# Altium PCB backup.PcbDoc (part 2 of 3)
Units mm, origin at the board's own origin, x right, y up, seen from the top; angles counter-clockwise.
Board outline 28.94 x 32.03 mm, 4 copper layers (Top Layer, Inner Layer 1, Inner Layer 2, Bottom Layer), stack 1.586 mm thick; 135 components, 83 nets, 442 pads, 355 vias.
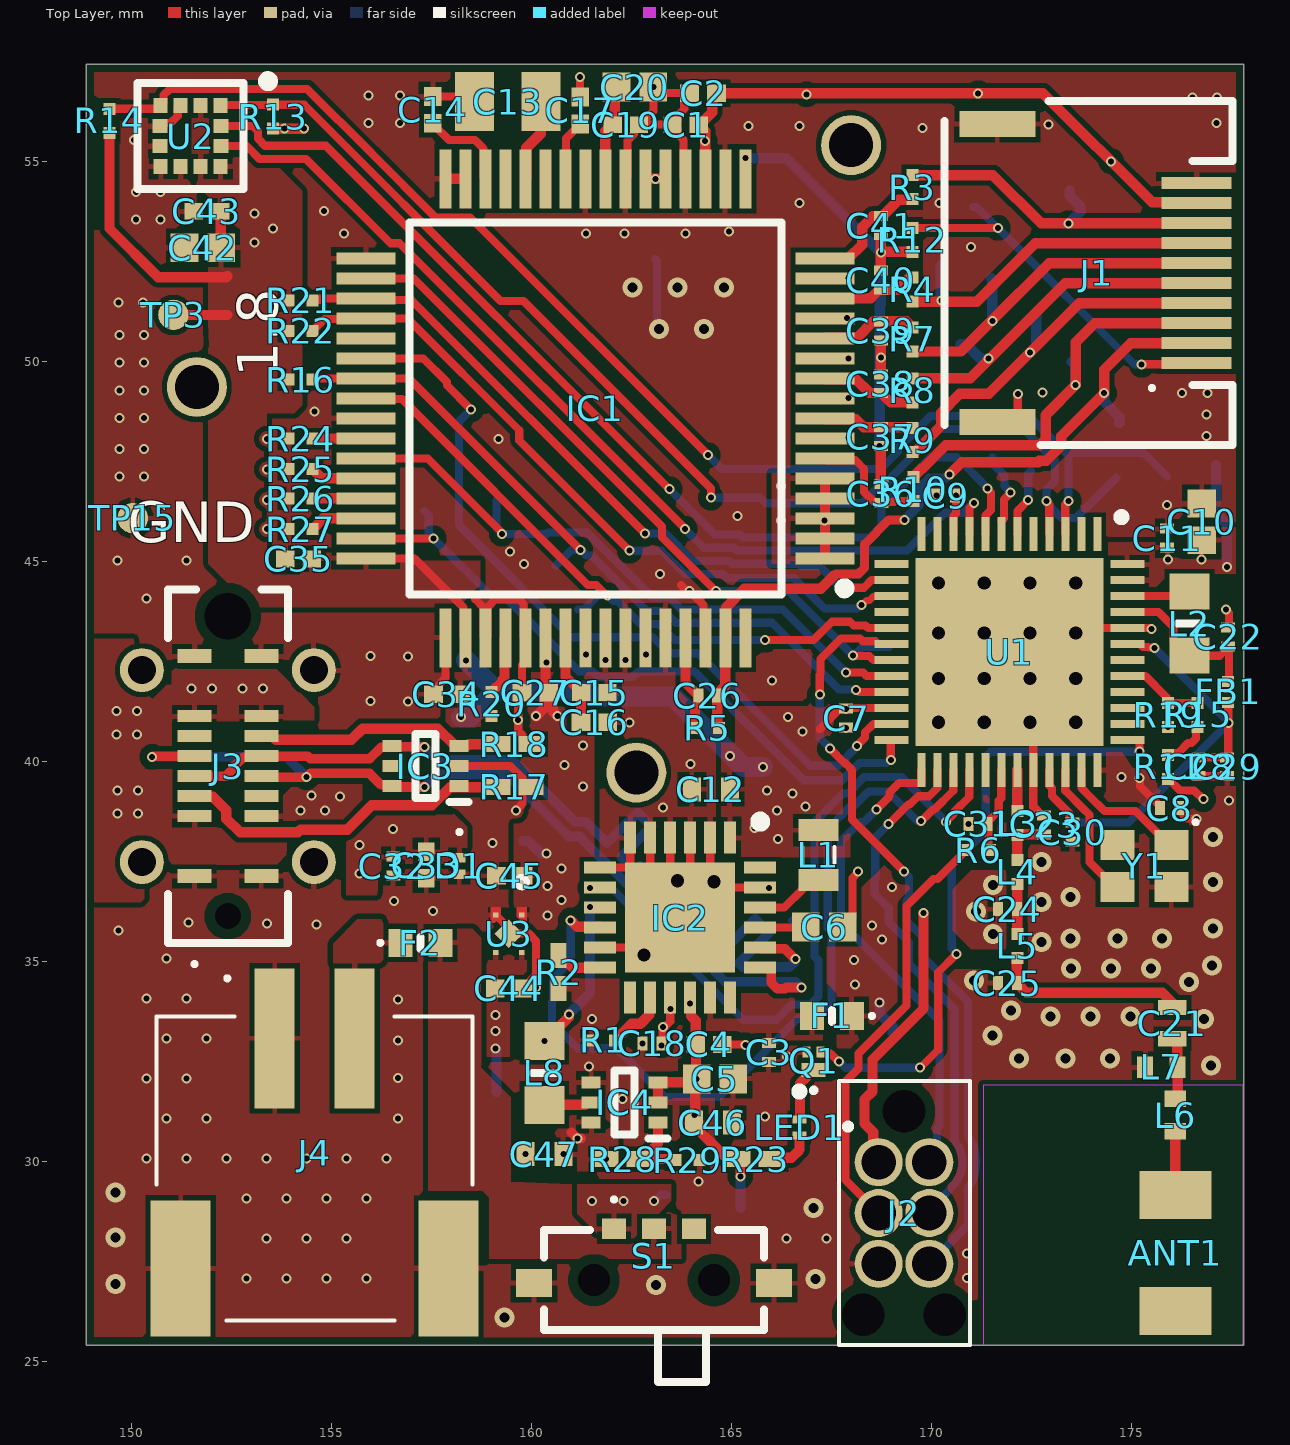
[diagram p0: Top Layer view]

## Via types
v1: diameter 0.25, hole 0.15, Top Layer to Bottom Layer, 295 vias
v2: diameter 0.5, hole 0.25, Top Layer to Bottom Layer, 41 vias
v3: diameter 0.66, hole 0.33, Top Layer to Bottom Layer, 19 vias

## Nets (pads, with @x,y where several pads share a name; then routed paths per layer and width w, separated by ;. In a path a pad name is that pad's centre, name@x,y a point inside that pad or via, vN(x,y) a via of type N, cw(c..) or ccw(c..) an arc to the next point about the centre after c; other vN are vias at no path point)
+1.8V: C7.1 C8.1 C9.1 C10.2 C11.1 C12.2 C34.1 C35.1 C42.1 C43.1 IC1.48 IC1.50 IC2.1 J2.1 L1.1 R13.2 R14.2 R16.2 R20.2 R21.2 R22.2 TP3.1 TP14.1 U1.10 U1.22 U1.36 U1.47 U1.48 U2.2 U2.9 U2.10 | length 37.4
  Top Layer w0.203: IC1.48@155.865,45.068 157.075,45.068 158.304,43.839 158.304,43.129 IC1.50@158.353,43.08 ; 167.202,40.792 167.695,41.285 C7.1@167.854,41.285 ; v1(167.869,41.3) C7.1@167.854,41.285 ; U1.22@169,41.325 167.893,41.325 C7.1@167.854,41.285 ; U1.10@170.55,45.675 170.552,45.677 170.552,46.125 170.62,46.193 170.62,46.634 v1(170.612,46.634) ; v1(175.209,39.573) 175.218,39.564 175.218,39.37 175.713,38.875 C8.1@175.713,38.825
  Top Layer w0.254: R14.2@149.454,55.707 149.454,53.315 150.673,52.095 152.375,52.095 152.4,52.121 ; TP3.1@151.054,51.156 152.4,51.156 ; C43.1@152.222,53.746 152.236,53.732 152.236,52.846 C42.1@152.25,52.832 ; R13.2@153.543,55.809 v1(154.319,55.809) ; J2.1@168.681,29.972 168.55,30.103 168.55,30.72 168.326,30.945 168.326,31.539 168.533,31.746 168.533,32.541 169.804,33.813 v1(169.804,36.205)
  Inner Layer 2 w0.254: v1(169.804,36.205) 169.804,37.623
  Bottom Layer w0.254: TP14.1@177.114,47.396 177.114,46.197 177.394,45.918 v1(177.394,44.856)
  Bottom Layer w0.508: v1(158.242,41.097) 158.465,41.097 159.128,41.76 ; v1(158.369,42.52) 159.128,41.76 ; v1(165.79,39.853) 165.303,39.853 163.54,41.616 161.472,41.616 161.327,41.76 159.128,41.76
  other v1: 166.167,38.049 165.583,38.329 166.141,38.76 166.856,38.866 166.526,39.196 165.887,39.268 174.752,39.599 164.973,40.132 166.776,40.742 166.421,41.097 175.92,45.034 176.759,45.034 153.086,52.959 153.543,53.315 153.086,53.696 153.825,55.809
+5V: C1.1 C2.1 C27.1 C45.1 IC1.1 IC1.2 IC1.3 IC1.4 IC1.5 IC1.7 IC1.9 IC1.11 IC1.13 IC1.15 IC1.19 IC1.21 IC1.22 IC1.54 IC1.56 IC1.59 J1.9 TP11.1 U3.1 | length 21.7
  Top Layer w0.254: v1(160.122,41.123) 160.329,41.33 160.329,41.619 160.422,41.712 C27.1@160.437,41.712 ; IC1.54@160.353,43.08 IC1.54@160.353,42.492 ; v1(160.378,42.467) IC1.54@160.353,42.492 ; v1(160.655,41.123) 160.545,41.233 160.545,41.619 160.452,41.712 C27.1@160.437,41.712 ; IC1.1@167.335,45.166 167.335,45.074 IC1.1@167.341,45.068 ; v1(167.335,46.02) 167.335,46.063 IC1.3@167.341,46.068 ; IC1.1@167.341,45.166 IC1.2@167.341,45.568 IC1.3@167.341,46.068 ; IC1.5@167.341,47.068 IC1.4@167.341,46.568 IC1.3@167.341,46.068 ; IC1.54@160.353,42.492 160.353,41.796 C27.1@160.437,41.712
  Top Layer w0.262: IC1.22@162.853,54.556 v1(163.103,54.556) IC1.21@163.353,54.556 ; C1.1@164.191,55.91 C1.1@164.211,55.91 ; IC1.19@164.353,54.556 164.353,55.748 164.29,55.811 164.29,55.831 C1.1@164.211,55.91 ; J1.9@176.63,53.95 176.611,53.969 175.52,53.969 172.791,56.698 171.171,56.698 166.878,56.698 C2.1@164.628,56.698 164.613,56.698 164.524,56.609 164.524,56.223 C1.1@164.211,55.91
  Bottom Layer w0.254: TP11.1@159.791,37.998 159.929,37.998 160.234,37.694 v1(160.376,37.694)
  other v1: 160.401,36.144 160.757,36.525 160.401,36.881 160.757,37.313 161.29,39.37 160.833,39.903 161.29,40.386 161.366,42.67 162.865,42.67 166.243,46.02 166.243,46.873 167.925,48.087 167.925,49.078 167.925,50.068 167.889,51.077 167.925,52.075 174.498,54.991 164.338,55.499 166.878,56.667 171.171,56.693
CC1: IC3.1 J3.A5 R17.1 | length 8.6
  Top Layer w0.262: J3.A5@151.58,39.125 151.599,39.106 152.039,39.106 152.379,38.766 152.379,38.557 152.718,38.217 154.164,38.217 154.23,38.283 155.402,38.283 156.013,38.894 157.514,38.894 157.97,39.35 R17.1@159.163,39.35
CC2: IC3.3 J3.B5 R18.1 | length 6.3
  Top Layer w0.262: J3.B5@153.25,40.625 153.269,40.606 153.544,40.606 153.617,40.533 155.501,40.533 155.78,40.812 157.664,40.812 158.081,40.394 158.409,40.394 158.44,40.425 R18.1@159.163,40.425
D_N: IC2.19 IC3.6 J3.A7 J3.B7 | length 22.6
  Top Layer w0.24: v1(150.52,40.107) 150.523,40.107 150.541,40.125 J3.A7@151.58,40.125 ; J3.B7@153.25,39.625 153.275,39.6 154.379,39.6 v1(154.381,39.599) 154.384,39.599 154.476,39.691 155.959,39.691 156.245,39.405 156.482,39.405 IC3.6@156.512,39.375 156.535,39.352 157.323,39.352 v1(157.325,39.35) ; IC2.19@165.723,34.837 165.97,34.837 165.999,34.807 165.999,34.456 166.145,34.31 166.344,34.31 166.373,34.339 166.749,34.339 v1(166.751,34.341)
  Bottom Layer w0.24: v1(150.52,40.107) 153.873,40.107 v1(154.381,39.599) ; v1(157.325,39.35) 157.328,39.35 157.645,39.668 159.383,39.668 160.936,38.115 161.21,38.115 164.841,34.484 166.606,34.484 166.748,34.341 v1(166.751,34.341)
D_P: IC2.20 IC3.4 J3.A6 J3.B6 | length 25.2
  Top Layer w0.24: J3.A6@151.58,39.625 152.366,39.625 152.578,39.837 152.578,39.877 152.796,40.095 153.22,40.095 J3.B6@153.25,40.125 154.408,40.125 154.474,40.059 155.959,40.059 156.245,40.345 156.482,40.345 IC3.4@156.512,40.375 156.529,40.358 157.33,40.358 v1(157.332,40.356) ; IC2.20@165.723,35.337 165.753,35.307 166.341,35.307 166.596,35.052 v1(166.599,35.052)
  Bottom Layer w0.24: v1(157.332,40.356) 157.332,40.353 157.508,40.177 157.649,40.035 158.013,40.035 159.535,40.035 159.627,39.943 161.088,38.482 161.362,38.482 161.809,38.035 161.894,37.95 162.66,38.716 163.01,38.366 162.244,37.6 162.594,37.251 162.726,37.383 163.075,37.033 162.943,36.901 163.642,36.202 163.992,35.852 164.545,36.405 164.895,36.055 164.342,35.502 164.691,35.153 165.595,36.056 165.944,35.707 165.189,34.951 165.288,34.851 165.538,34.851 166.453,34.851 166.597,34.995 166.597,35.05 v1(166.599,35.052)
DCC: L2.1 U1.46 | length 1.6
  Top Layer w0.203: U1.46@174.9,44.125 176.345,44.125 L2.1@176.454,44.234
DECA: C28.2 C29.2 C30.2 FB1.2 U1.33 U1.43 | length 12
  Top Layer w0.203: U1.33@172.95,39.775 172.95,39.394 173.02,39.324 173.02,39.123 173.452,38.691 173.452,38.485 173.475,38.462 v1(173.525,38.462) ; U1.43@174.9,42.925 175.222,42.925 175.293,42.854 175.42,42.854 175.435,42.838 175.556,42.838 v1@175.565,42.829 ; C28.2@176.684,40.095 C29.2@177.395,40.095 177.402,40.095 177.425,40.119 v1(177.425,40.95) 177.422,40.953 177.422,41.466 FB1.2@177.419,41.469
  Bottom Layer w0.203: v1(173.525,38.462) 174.937,38.462 v1(177.425,40.95) 177.416,40.959 177.416,40.991 v1(175.578,42.829)
DECD: C22.2 FB1.1 L2.2 U1.45 | length 4.1
  Top Layer w0.203: U1.45@174.9,43.725 175.677,43.725 176.055,43.347 176.055,42.982 176.404,42.634 L2.2@176.454,42.634 177.212,42.634 C22.2@177.371,42.793 ; C22.2@177.371,42.843 177.444,42.843 177.444,42.021 FB1.1@177.419,41.995
FB: IC4.1 R28.1 R29.1 | length 2
  Top Layer w0.254: R28.1@162.693,30.048 R28.1@162.805,30.048 ; IC4.1@163.169,30.971 163.169,30.44 162.878,30.148 162.878,30.121 R28.1@162.805,30.048 ; R29.1@163.606,30.023 163.581,30.048 R28.1@162.805,30.048